# EAGLE board headstage-64_via-reduce (EAGLE 8.3.2), part 1 of 3
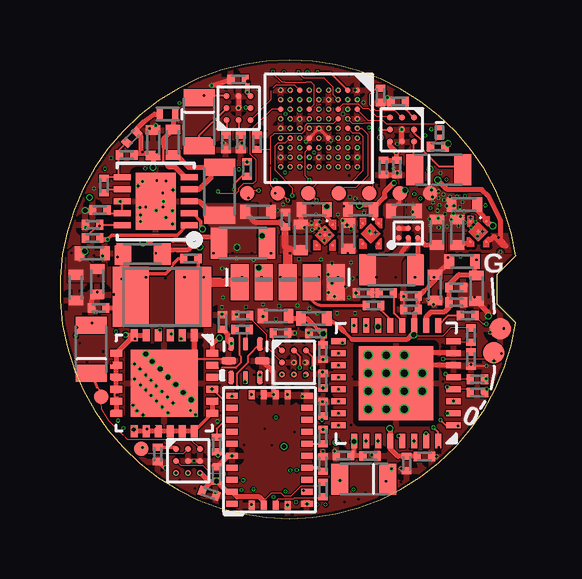
[diagram p0: board, top side]
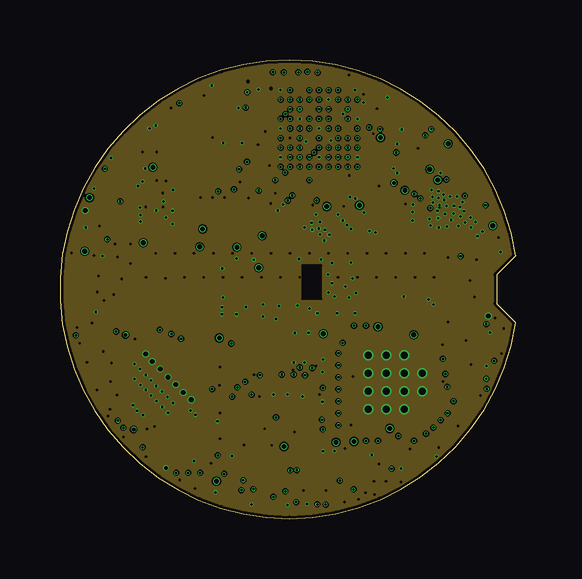
[diagram p1: board, inner layer GND1]
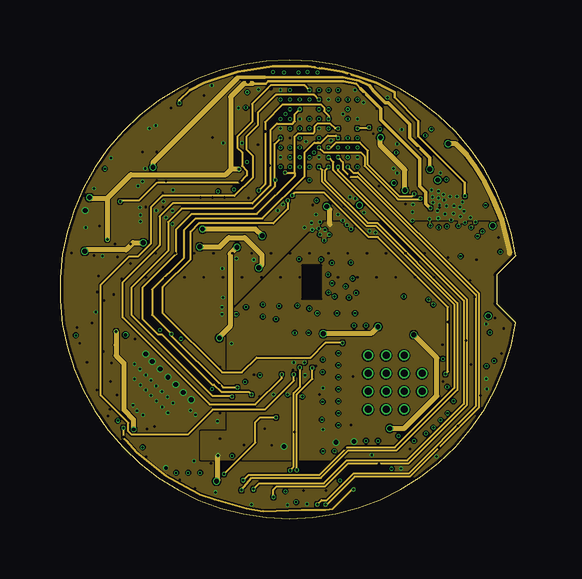
[diagram p2: board, inner layer Route2/PWR]
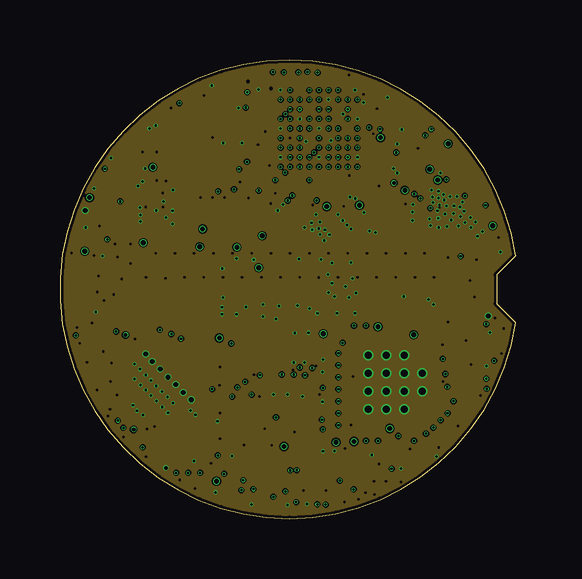
[diagram p3: board, inner layer GND2]
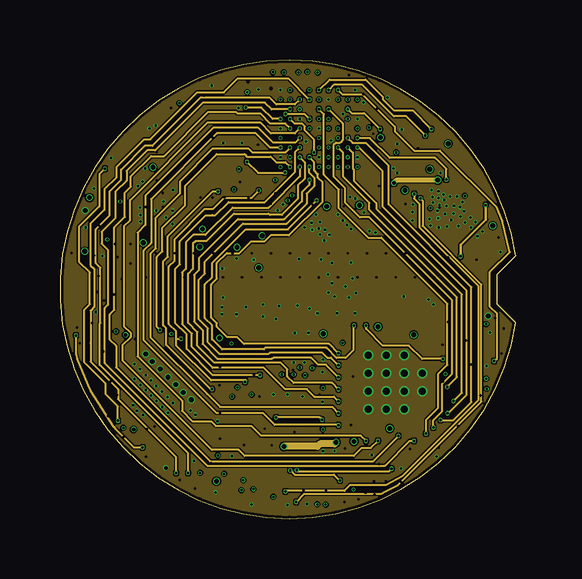
[diagram p4: board, inner layer Route3]
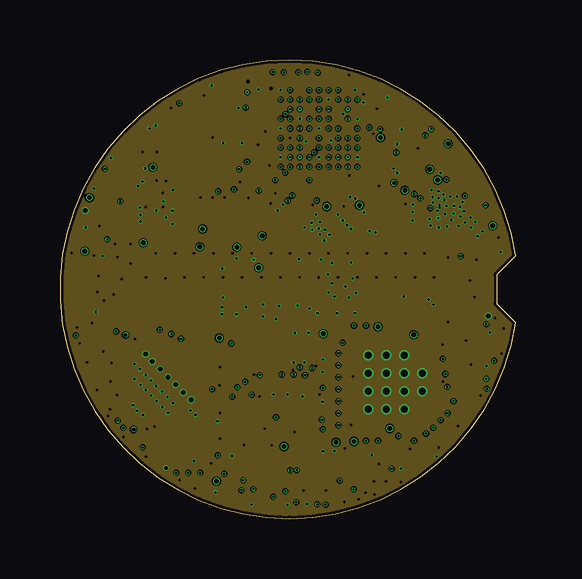
[diagram p5: board, inner layer GND3]
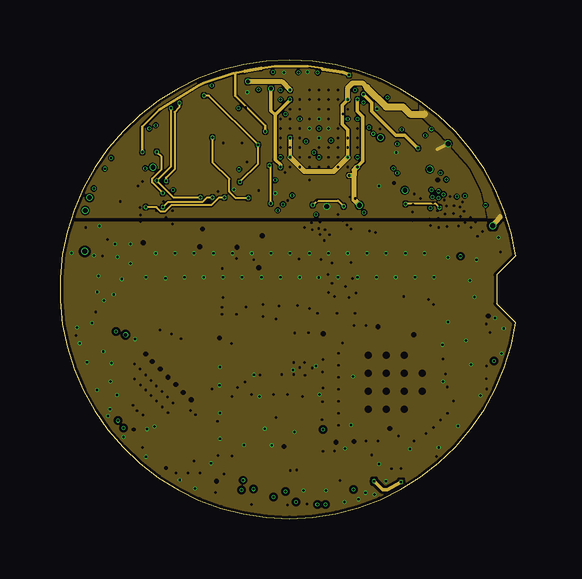
[diagram p6: board, inner layer AGND/PWR]
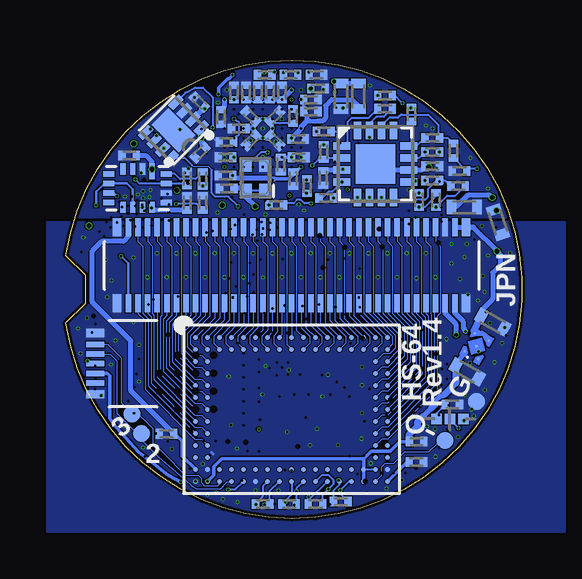
[diagram p7: board, bottom side, seen from below]

Size 18.99 x 19.11 mm. Coordinates in mm from the lower left corner, seen from the top.
Outline: 18.99,10.95 18.19,10.15 18.19,8.95 18.99,8.15 arc-343 18.99,10.95
Copper layers ((1*2*3*4*5*6)+(7*16)): Top 0.036mm / dielectric 4mil / GND1 0.036mm / dielectric 5mil / Route2/PWR 0.036mm / dielectric 0.10921875mm / GND2 0.036mm / dielectric 5mil / Route3 0.036mm / dielectric 4mil / GND3 0.035mm / dielectric 0.15mm / AGND/PWR 0.035mm / dielectric 0.2mm / Bottom 0.036mm
Design rules "headstage-256 *": minimum track width 2mil, minimum drill 0.1mm, track to track 2mil, track to pad 2mil, pad to pad 2mil, via to via 2mil, smd to smd 2mil, copper to edge 5mil, drill to drill 5mil, minimum pad ring 2mil, minimum via ring 1mil, stop-mask expansion 1mil, vias tented up to drill 1mm, thermal gap 10mil
Net classes: 1 thick: width 0.1 mm; 2 diff: width 0.076 mm, drill 0.1 mm, clearance 0.051 mm
tRestrict: area 10.1,9.1 to 10.9,10.7; 3 lines

## Footprints (pad centres in the part's own frame; a part is rotated, then mirrored left to right if it is on the bottom)
0201T = smd 0.3 x 0.4: 1 -0.3,0; 2 0.3,0
0402T = smd 0.4 x 0.6: 1 -0.533,0; 2 0.533,0
0805PT = smd 0.7 x 1.3: A -1,0; C 1,0
LED-0201T = smd 0.2 x 0.35: 1 -0.2,0; 2 0.2,0
CLP1006-2L = smd 0.24 x 0.49: A -0.325,0; C 0.325,0
HEADSTAGE-64-REV1.4-DAUGHTER-CARD = smd 0.75 x 1.5: 1 -2.55,-0.1; 2 -1.55,-0.1; 3 -0.55,-0.1; 4 0.45,-0.1; 5 1.45,-0.1
DF40-70HEAD-LESS-SILK = smd 0.23 x 0.75: 1 -6.8,-1.585; 2 -6.4,-1.585; 3 -6,-1.585; 4 -5.6,-1.585; 5 -5.2,-1.585; 6 -4.8,-1.585; 7 -4.4,-1.585; 8 -4,-1.585; 9 -3.6,-1.585; 10 -3.2,-1.585; 11 -2.8,-1.585; 12 -2.4,-1.585; 13 -2,-1.585; 14 -1.6,-1.585; 15 -1.2,-1.585; 16 -0.8,-1.585; 17 -0.4,-1.585; 18 0,-1.585; 19 0.4,-1.585; 20 0.8,-1.585; 21 1.2,-1.585; 22 1.6,-1.585; 23 2,-1.585; 24 2.4,-1.585; 25 2.8,-1.585; 26 3.2,-1.585; 27 3.6,-1.585; 28 4,-1.585; 29 4.4,-1.585; 30 4.8,-1.585; 31 5.2,-1.585; 32 5.6,-1.585; 33 6,-1.585; 34 6.4,-1.585; 35 6.8,-1.585; 36 6.8,1.585; 37 6.4,1.585; 38 6,1.585; 39 5.6,1.585; 40 5.2,1.585; 41 4.8,1.585; 42 4.4,1.585; 43 4,1.585; 44 3.6,1.585; 45 3.2,1.585; 46 2.8,1.585; 47 2.4,1.585; 48 2,1.585; 49 1.6,1.585; 50 1.2,1.585; 51 0.8,1.585; 52 0.4,1.585; 53 0,1.585; 54 -0.4,1.585; 55 -0.8,1.585; 56 -1.2,1.585; 57 -1.6,1.585; 58 -2,1.585; 59 -2.4,1.585; 60 -2.8,1.585; 61 -3.2,1.585; 62 -3.6,1.585; 63 -4,1.585; 64 -4.4,1.585; 65 -4.8,1.585; 66 -5.2,1.585; 67 -5.6,1.585; 68 -6,1.585; 69 -6.4,1.585; 70 -6.8,1.585 | smd 0.35 x 0.75: M1 -7.275,-1.585; M2 7.275,-1.585; M3 7.275,1.585; M4 -7.275,1.585
DF40-10HEAD_HALF = smd 0.23 x 0.75: 1 -0.8,-1.585; 2 -0.4,-1.585; 3 0,-1.585; 4 0.4,-1.585; 5 0.8,-1.585 | smd 0.35 x 0.75: M1 -1.275,-1.585; M2 1.275,-1.585
0603T = smd 0.7 x 0.9: 1 -0.82,0; 2 0.82,0
1210T = smd 1.5 x 2.5: 1 -1.3,0; 2 1.3,0
0805T = smd 0.7 x 1.3: 1 -1,0; 2 1,0
SJ_2_0201_T = smd 0.432 x 0.432: 1 -0.559,0; 2 0.559,0; COM 0,0
TP07R = smd 0.7 x 0.7: TP 0,0
TP09R = smd 0.9 x 0.9: TP 0,0
TP06R = smd 0.6 x 0.6: TP 0,0
CP_16_27-L = smd 0.711 x 0.305: 1 -1.397,0.75; 2 -1.397,0.25; 3 -1.397,-0.25; 4 -1.397,-0.75; 9 1.397,-0.75; 10 1.397,-0.25; 11 1.397,0.25; 12 1.397,0.75 | smd 0.305 x 0.711: 5 -0.75,-1.397; 6 -0.25,-1.397; 7 0.25,-1.397; 8 0.75,-1.397; 13 0.75,1.397; 14 0.25,1.397; 15 -0.25,1.397; 16 -0.75,1.397 | smd 1.651 x 1.651: PAD 0,0
CP_8_10-L = smd 0.635 x 0.305: 1 -0.889,0.75; 2 -0.889,0.25; 3 -0.889,-0.25; 4 -0.889,-0.75; 5 0.889,-0.75; 6 0.889,-0.25; 7 0.889,0.25; 8 0.889,0.75 | smd 0.991 x 1.6: PAD 0,0
QFN24-4X4 = smd 0.5 x 0.3: 1 -2,1.25; 2 -2,0.75; 3 -2,0.25; 4 -2,-0.25; 5 -2,-0.75; 6 -2,-1.25; 13 2,-1.25; 14 2,-0.75; 15 2,-0.25; 16 2,0.25; 17 2,0.75; 18 2,1.25 | smd 0.3 x 0.5: 7 -1.25,-2; 8 -0.75,-2; 9 -0.25,-2; 10 0.25,-2; 11 0.75,-2; 12 1.25,-2; 19 1.25,2; 20 0.75,2; 21 0.25,2; 22 -0.25,2; 23 -0.75,2; 24 -1.25,2 | smd 2.8 x 2.8: PAD 0,0
UQFN = smd 0.55 x 0.25: 1 -0.7,0.6; 3 -0.7,-0.6; 5 0.7,-0.6; 7 0.7,0.6 | smd 0.55 x 0.2: 2 -0.7,0; 6 0.7,0 | smd 0.3 x 0.6: 4 0,-0.7; 8 0,0.7
MQFN16-1.8X2.6 = smd 0.663 x 0.225: 1 -0.7,0.6 | smd 0.463 x 0.225: 2 -0.8,0.2; 3 -0.8,-0.2; 4 -0.8,-0.6; 9 0.8,-0.6; 10 0.8,-0.2; 11 0.8,0.2; 12 0.8,0.6 | smd 0.225 x 0.463: 5 -0.6,-1.2; 6 -0.2,-1.2; 7 0.2,-1.2; 8 0.6,-1.2; 13 0.6,1.2; 14 0.2,1.2; 15 -0.2,1.2; 16 -0.6,1.2
WLCSP3X3 = smd 0.25 x 0.25: A1 -0.5,0.5; A2 0,0.5; A3 0.5,0.5; B1 -0.5,0; B2 0,0; B3 0.5,0; C1 -0.5,-0.5; C2 0,-0.5; C3 0.5,-0.5
BGA104_0.5MM = smd 0.2 x 0.2: A1 -4,3; A2 -3.5,3; A3 -3,3; A4 -2.5,3; A5 -2,3; A6 -1.5,3; A7 -1,3; A8 -0.5,3; A9 0,3; A10 0.5,3; A11 1,3; A12 1.5,3; A13 2,3; A14 2.5,3; A15 3,3; A16 3.5,3; A17 4,3; B1 -4,2.5; B2 -3.5,2.5; B3 -3,2.5; B4 -2.5,2.5; B5 -2,2.5; B6 -1.5,2.5; B7 -1,2.5; B8 -0.5,2.5; B9 0,2.5; B10 0.5,2.5; B11 1,2.5; B12 1.5,2.5; B13 2,2.5; B14 2.5,2.5; B15 3,2.5; B16 3.5,2.5; B17 4,2.5; C1 -4,2; C2 -3.5,2; C16 3.5,2; C17 4,2; D1 -4,1.5; D2 -3.5,1.5; D16 3.5,1.5; D17 4,1.5; E1 -4,1; E2 -3.5,1; E16 3.5,1; E17 4,1; F1 -4,0.5; F2 -3.5,0.5; F16 3.5,0.5; F17 4,0.5; G1 -4,0; G2 -3.5,0; G16 3.5,0; G17 4,0; H1 -4,-0.5; H2 -3.5,-0.5; H16 3.5,-0.5; H17 4,-0.5; J1 -4,-1; J2 -3.5,-1; J16 3.5,-1; J17 4,-1; K1 -4,-1.5; K2 -3.5,-1.5; K16 3.5,-1.5; K17 4,-1.5; L1 -4,-2; L2 -3.5,-2; L16 3.5,-2; L17 4,-2; M1 -4,-2.5; M2 -3.5,-2.5; M3 -3,-2.5; M4 -2.5,-2.5; M5 -2,-2.5; M6 -1.5,-2.5; M7 -1,-2.5; M8 -0.5,-2.5; M9 0,-2.5; M10 0.5,-2.5; M11 1,-2.5; M12 1.5,-2.5; M13 2,-2.5; M14 2.5,-2.5; M15 3,-2.5; M16 3.5,-2.5; M17 4,-2.5; N1 -4,-3; N2 -3.5,-3; N3 -3,-3; N4 -2.5,-3; N5 -2,-3; N6 -1.5,-3; N7 -1,-3; N8 -0.5,-3; N9 0,-3; N10 0.5,-3; N11 1,-3; N12 1.5,-3; N13 2,-3; N14 2.5,-3; N15 3,-3; N16 3.5,-3; N17 4,-3
WQFN32-5X5 = smd 0.25 x 0.6: 1 1.75,2.4; 2 1.25,2.4; 3 0.75,2.4; 4 0.25,2.4; 5 -0.25,2.4; 6 -0.75,2.4; 7 -1.25,2.4; 8 -1.75,2.4; 17 -1.75,-2.4; 18 -1.25,-2.4; 19 -0.75,-2.4; 20 -0.25,-2.4; 21 0.25,-2.4; 22 0.75,-2.4; 23 1.25,-2.4; 24 1.75,-2.4 | smd 0.6 x 0.25: 9 -2.4,1.75; 10 -2.4,1.25; 11 -2.4,0.75; 12 -2.4,0.25; 13 -2.4,-0.25; 14 -2.4,-0.75; 15 -2.4,-1.25; 16 -2.4,-1.75; 25 2.4,-1.75; 26 2.4,-1.25; 27 2.4,-0.75; 28 2.4,-0.25; 29 2.4,0.25; 30 2.4,0.75; 31 2.4,1.25; 32 2.4,1.75 | smd 3.1 x 3.1: PAD 0,0
LGA-28-3.8X5.2 = smd 0.25 x 0.475: 1 -2.25,1.56; 6 -2.25,-1.56; 7 -1.75,-1.56; 8 -1.25,-1.56; 9 -0.75,-1.56; 10 -0.25,-1.56; 11 0.25,-1.56; 12 0.75,-1.56; 13 1.25,-1.56; 14 1.75,-1.56; 15 2.25,-1.56; 20 2.25,1.56; 21 1.75,1.56; 22 1.25,1.56; 23 0.75,1.56; 24 0.25,1.56; 25 -0.25,1.56; 26 -0.75,1.56; 27 -1.25,1.56; 28 -1.75,1.56 | smd 0.375 x 0.25: 2 -2.3,0.75; 3 -2.3,0.25; 4 -2.3,-0.25; 5 -2.3,-0.75; 16 2.3,-0.75; 17 2.3,-0.25; 18 2.3,0.25; 19 2.3,0.75
X2SON = smd 0.1 x 0.1: 1 -0.43,0.33; 2 -0.43,-0.33; 3 0.43,-0.33; 4 0.43,0.33 | smd 0.1 x 0.1 rotated 45: PAD 0,0
VBGA81-4X4 = smd 0.23 x 0.23: A1 1.6,1.6; A2 1.2,1.6; A3 0.8,1.6; A4 0.4,1.6; A5 0,1.6; A6 -0.4,1.6; A7 -0.8,1.6; A8 -1.2,1.6; A9 -1.6,1.6; B1 1.6,1.2; B2 1.2,1.2; B3 0.8,1.2; B4 0.4,1.2; B5 0,1.2; B6 -0.4,1.2; B7 -0.8,1.2; B8 -1.2,1.2; B9 -1.6,1.2; C1 1.6,0.8; C2 1.2,0.8; C3 0.8,0.8; C4 0.4,0.8; C5 0,0.8; C6 -0.4,0.8; C7 -0.8,0.8; C8 -1.2,0.8; C9 -1.6,0.8; D1 1.6,0.4; D2 1.2,0.4; D3 0.8,0.4; D4 0.4,0.4; D5 0,0.4; D6 -0.4,0.4; D7 -0.8,0.4; D8 -1.2,0.4; D9 -1.6,0.4; E1 1.6,0; E2 1.2,0; E3 0.8,0; E4 0.4,0; E5 0,0; E6 -0.4,0; E7 -0.8,0; E8 -1.2,0; E9 -1.6,0; F1 1.6,-0.4; F2 1.2,-0.4; F3 0.8,-0.4; F4 0.4,-0.4; F5 0,-0.4; F6 -0.4,-0.4; F7 -0.8,-0.4; F8 -1.2,-0.4; F9 -1.6,-0.4; G1 1.6,-0.8; G2 1.2,-0.8; G3 0.8,-0.8; G4 0.4,-0.8; G5 0,-0.8; G6 -0.4,-0.8; G7 -0.8,-0.8; G8 -1.2,-0.8; G9 -1.6,-0.8; H1 1.6,-1.2; H2 1.2,-1.2; H3 0.8,-1.2; H4 0.4,-1.2; H5 0,-1.2; H6 -0.4,-1.2; H7 -0.8,-1.2; H8 -1.2,-1.2; H9 -1.6,-1.2; J1 1.6,-1.6; J2 1.2,-1.6; J3 0.8,-1.6; J4 0.4,-1.6; J5 0,-1.6; J6 -0.4,-1.6; J7 -0.8,-1.6; J8 -1.2,-1.6; J9 -1.6,-1.6
DFN103X3 = smd 0.7 x 0.25: 1 -1.4,1; 2 -1.4,0.5; 3 -1.4,0; 4 -1.4,-0.5; 5 -1.4,-1; 6 1.4,-1; 7 1.4,-0.5; 8 1.4,0; 9 1.4,0.5; 10 1.4,1 | smd 1.65 x 2.38: PAD 0,0
XBGA6_1.2X0.8 = smd 0.23 x 0.23: A1 0.2,-0.4; A2 -0.2,-0.4; B1 0.2,0; B2 -0.2,0; C1 0.2,0.4; C2 -0.2,0.4
ASCO = smd 0.6 x 0.5: 1 -0.55,-0.4; 2 0.55,-0.4; 3 0.55,0.4; 4 -0.55,0.4

## Placement (x,y rotation side)
C1  0.1uF  [0201T]  8.27,14.19 270 bottom
C2  0.1uF  [0201T]  13.39,15.25 225 bottom
C3  0.1uF  [0201T]  13.43,17.35 135 bottom
C4  0.1uF  [0201T]  3.73,14.68 0 bottom
C5  0.1uF  [0201T]  6.77,8.19 90 top
C6  0.1uF  [0201T]  1.61,8.77 180 top
C7  10uF  [0402T]  1.55,9.86 270 top
C8  0.1uF  [0201T]  13.94,13.15 90 bottom
C9  0.1uF  [0201T]  16.36,15.13 180 bottom
C10  10nF  [0201T]  16.51,9.01 0 top
C11  0.1uF  [0201T]  16.51,9.62 0 top
C12  4.7uF  [0402T]  17.36,9.59 270 top
C13  0.1uF  [0201T]  15.19,2.58 0 top
C14  10nF  [0201T]  14.44,2.29 270 top
C15  10nF  [0201T]  14.62,8.71 180 top
C16  0.1uF  [0201T]  14.62,9.27 180 top
C17  4.7uF  [0402T]  15.62,9.62 270 top
C18  0.1uF  [0201T]  10.95,5.74 90 top
C19  1uF  [0201T]  9.19,7.73 0 top
C20  0.1uF  [0201T]  12.92,2.61 0 top
C21  10nF  [0201T]  11.81,2.63 180 top
C22  10nF  [0201T]  10.67,7.7 180 top
C23  0.1uF  [0201T]  10.95,6.93 270 top
C24  15uF  [0402T]  8.98,8.43 180 top
C25  0.1uF  [0201T]  13.06,8.87 0 top
C26  47nF  [0201T]  13.59,9.4 0 top
C27  0.1uF  [0201T]  14.03,14.63 270 top
C28  1uF  [0201T]  14.09,17.37 180 top
C29  10nF  [0201T]  4.39,2.35 0 bottom
C30  0.1uF  [0201T]  4.38,3.2 180 bottom
C31  0.1uF  [0201T]  6.52,1.85 90 top
C32  0.1uF  [0201T]  7.42,18.29 180 top
C33  0.1uF  [0201T]  10.95,2.27 270 top
C34  1uF  [0201T]  6.92,15.67 270 top
C35  0.1uF  [0201T]  6.21,1.05 340 top
C36  1uF  [0201T]  4.07,2.67 270 top
C37  10uF  [0402T]  1.21,8.18 330.9 bottom
C38  10uF  [0402T]  2.28,6.12 330.9 bottom
C39  10uF  [0402T]  10.03,11.71 90 top
C40  10uF  [0402T]  10.59,12.88 180 top
C41  1uF  [0402T]  8.25,12.78 0 top
C42  0.22uF  [0402T]  2.39,12.97 0 bottom
C43  2.2nF  [0201T]  9.29,15.05 0 bottom
C44  4.7nF  [0201T]  12.34,15.05 180 bottom
C45  10nF  [0201T]  11.99,17.75 90 bottom
C46  22nF  [0201T]  8.79,17.45 0 bottom
C47  47nF  [0201T]  8.79,16.95 0 bottom
C48  0.1uF  [0201T]  10.04,14.75 270 bottom
C49  1uF  [0201T]  9.33,15.81 0 bottom
C50  4.7nF  [0201T]  9.99,17.75 90 bottom
C51  10nF  [0201T]  10.49,17.75 90 bottom
C52  22nF  [0201T]  10.99,17.75 90 bottom
C53  0.47uF  [0201T]  11.49,17.75 90 bottom
C54  10uF  [0402T]  7.53,17.59 270 bottom
C55  10uF  [0402T]  12.01,11.77 90 top
C56  10uF  [0402T]  12.53,12.88 180 top
C57  10pF  [0201T]  2.99,15.88 45 top
C58  4.7nF  [0201T]  10.29,16.75 45 bottom
C59  10nF  [0201T]  10.29,15.75 315 bottom
C60  22nF  [0201T]  11.27,15.75 225 bottom
C61  47nF  [0201T]  11.29,16.75 135 bottom
C62  0.47uF  [0201T]  11.79,16.25 180 bottom
C63  1uF  [0402T]  4.7,15.67 90 top
C64  0.22uF  [0402T]  3.88,15.65 90 top
C65  4.7nF  [0201T]  9.52,14.15 270 bottom
C66  10nF  [0201T]  12.34,14.29 180 bottom
C67  22nF  [0201T]  8.49,17.91 0 bottom
C68  0.47uF  [0201T]  12.53,16.73 270 bottom
C69  10uF  [0402T]  14.33,12.81 0 top
C70  4.7uF  [0402T]  15.71,11.93 90 top
C71  10nF  [0201T]  12.29,13.75 180 bottom
C72  1uF  [0402T]  16.55,11.93 90 top
C73  15uF  [0402T]  16.85,13.08 180 top
C74  10uF  [0402T]  1.34,11.05 0 top
C75  0.1uF  [0201T]  9.39,12.45 90 top
C76  1uF  [0201T]  13.47,14.63 270 top
C77  10uF  [0402T]  0.66,9.62 270 top
D4  VEMD1160X01  [0805PT]  12.66,1.64 0 top
D5  VEMD1160X01  [0805PT]  15.78,14.53 180 top
D6  VEMD1160X01  [0805PT]  5.8,16.53 90 top
D7  XZVGR155W  [LED-0201T]  15.81,16.08 270 top
D8  VEMD1160X01  [0805PT]  1.3,7.05 270 top
D9  VSKY05401006  [CLP1006-2L]  4.48,16.85 0 top
J1  [HEADSTAGE-64-REV1.4-DAUGHTER-CARD]  10.04,9.95 0 top
J8  DF40C-70DP-0.4V(51)  [DF40-70HEAD-LESS-SILK]  9.59,10.55 0 bottom
J9  DF40C-10DP-0.4V(51)  [DF40-10HEAD_HALF]  16.19,6.45 270 bottom
L2  BLM18KG601SN1D  [0603T]  3.44,11.02 0 top
L4  CBC3225T101MR  [1210T]  4.25,9.23 180 top
L6  BLM15PX601SN1D  [0402T]  16.75,10.71 0 top
L7  BLM15PX601SN1D  [0402T]  0.99,12.35 287.8 bottom
L8  BLM15PX601SN1D  [0402T]  10.58,8.33 180 top
L9  MLZ2012M100WT000  [0805T]  7.62,11.47 180 top
L10  BLM15PX601SN1D  [0402T]  6.81,17.59 90 bottom
L11  MLZ2012M100WT000  [0805T]  6.65,13.63 270 top
L12  LQM21PN1R0NGRD  [0805T]  13.81,10.36 180 top
R1  9k, 0.1%  [0201T]  8.25,15.27 90 bottom
R2  1k, 0.1%  [0201T]  8.15,13.35 180 bottom
R3  1M  [0201T]  2.89,4.75 0 bottom
R4  10k, 0.1%  [0201T]  10.23,13.06 0 bottom
R5  10k, 0.1%  [0201T]  8.25,16.13 0 bottom
R6  10k, 0.1%  [0201T]  4.6,16.84 90 bottom
R7  10k, 0.1%  [0201T]  3.73,15.86 180 bottom
R8  10k, 0.1%  [0201T]  3.73,14.09 180 bottom
R9  10k  [0201T]  8.21,15.68 90 top
R10  1k  [0201T]  5.45,10.83 180 top
R11  10k, 0.1%  [0201T]  5.7,17.07 0 bottom
R12  100  [0201T]  5.7,17.63 180 bottom
R13  2.86k, 1%  [0201T]  2.65,13.85 180 bottom
R14  10k, 0.1%  [0201T]  2.84,15.32 90 bottom
R15  590  [0201T]  7.59,7.88 0 top
R16  10k, 0.1%  [0201T]  3.57,13.27 270 bottom
R17  10k, 0.1%  [0201T]  4.28,13.27 270 bottom
R18  10k, 0.1%  [0201T]  3.73,15.27 180 bottom
R19  10k, 0.1%  [0201T]  2.59,14.48 0 bottom
R21  1k  [0201T]  13.29,13.15 270 bottom
R22  10k  [0201T]  13.29,14.15 90 bottom
R23  10k  [0201T]  13.94,14.16 90 bottom
R24  15k  [0201T]  7.61,8.45 0 top
R25  49.9  [0201T]  12.64,9.4 0 top
R26  15k  [0201T]  13.35,17.63 90 top
R27  10k  [0201T]  17.13,7.64 270 top
R28  10k  [0201T]  10.96,1.21 270 top
R29  0  [0201T]  14.8,3.53 0 bottom
R30  100k  [0201T]  17.13,6.64 270 top
R31  100  [0201T]  10.79,0.6 0 bottom
R32  10k  [0201T]  10.95,3.41 90 top
R33  10k  [0201T]  16.99,8.45 180 top
R34  100  [0201T]  9.69,0.6 0 bottom
R35  100  [0201T]  8.59,0.6 180 bottom
R36  15k  [0201T]  7.53,15.67 90 top
R37  2k  [0201T]  15.74,15.49 180 top
R38  10k  [0201T]  12.31,15.69 0 bottom
R41  4.7k  [0201T]  7.79,14.56 270 top
R42  15k  [0201T]  10.95,4.57 270 top
R44  4.7k  [0201T]  17.39,5.25 180 top
R45  1M  [0201T]  1.36,11.69 0 top
R46  90.9k  [0201T]  1.36,12.24 0 top
R47  100  [0201T]  7.54,0.7 0 bottom
R48  83.3k  [0201T]  1.83,13.87 270 top
R49  10k  [0201T]  1.66,12.85 180 top
R50  1M  [0201T]  2.78,15.14 180 top
R51  4.7k  [0201T]  8.94,13.85 270 bottom
R52  4.7k  [0201T]  17.39,5.8 180 top
R53  10k  [0201T]  6.53,3.08 90 top
R54  10k  [0201T]  9.53,16.77 90 bottom
R55  10k  [0201T]  9.63,18.49 180 bottom
R56  10k  [0201T]  10.71,18.49 180 bottom
R57  10k  [0201T]  8.55,18.49 0 bottom
SJ1  [SJ_2_0201_T]  2.99,4.15 180 bottom
TP1  VCC  [TP07R]  1.89,4.88 0 bottom
TP2  VCC  [TP07R]  3.19,3.25 0 bottom
TP3  [TP09R]  18.34,7.9 0 top
TP4  [TP09R]  18.07,6.91 0 top
TP5  VCC  [TP07R]  16.24,4.36 0 bottom
TP6  VCC  [TP07R]  15.85,3.54 0 bottom
TP7  [TP06R]  1.71,5.07 0 top
TP8  [TP06R]  3.39,2.91 0 top
TP9  [TP06R]  14.16,13.56 0 top
TP10  [TP06R]  9.08,13.56 270 top
TP11  [TP06R]  7.81,13.56 270 top
TP12  [TP06R]  11.62,13.56 270 top
TP13  [TP06R]  10.35,13.56 270 top
TP14  gnd  [TP06R]  12.89,13.56 270 top
TP15  VCC  [TP06R]  15.43,13.56 270 top
U1  ADA4062-4ACPZ-R7  [CP_16_27-L]  6.1,14.77 0 bottom
U2  AD5681RBCPZ-1RL7  [CP_8_10-L]  14.51,16.18 225 bottom
U3  CAT4016_QFN  [QFN24-4X4]  4.34,5.64 270 top
U4  TPL0501_UQFN  [UQFN]  7.73,6.57 90 top
U5  DG509B  [MQFN16-1.8X2.6]  16.01,13.76 270 bottom
U6  TS4231  [WLCSP3X3]  9.74,6.5 0 top
U7  RHD2064_BGA  [BGA104_0.5MM]  9.59,4.55 0 bottom
U8  TS4231  [WLCSP3X3]  14.24,16.2 270 top
U9  DS90UB933A_WQFN  [WQFN32-5X5]  14,5.64 270 top
U10  BNO055  [LGA-28-3.8X5.2]  8.73,2.86 90 top
U11  TS4231  [WLCSP3X3]  7.44,17.1 90 top
U12  TS4231  [WLCSP3X3]  5.34,2.4 0 top
U13  TLV70733  [X2SON]  1.88,7.18 60.9 bottom
U14  10M08DC  [VBGA81-4X4]  10.79,16.25 0 top
U15  TLV70733  [X2SON]  11.03,11.81 270 top
U16  LT3463  [DFN103X3]  3.99,13.21 180 top
U17  TLV70725  [X2SON]  12.95,11.87 270 top
U18  TPS62621  [XBGA6_1.2X0.8]  14.51,11.89 270 top
U19  ASCO-50.000MHZ-EK-T3  [ASCO]  11.09,14.2 90 bottom
U20  TLV70712  [X2SON]  17.43,11.95 270 top

## Library data of the parts
C1 = jonnew; PARTNP: CL03A104KA3NNNC
C2 C3 C5 C6 C18 C27 C32 C33 C35 C75 = jonnew; PARTNO: C0603X5R1C104K030BC
C4 C8 C9 = jonnew; PARTNO: CL03A104KA3NNNC
C7 C74 C77 = jonnew; PARTNO: CL05A475MO5NUNC
C10 C11 C13-C16 C20-C23 C30 C31 C43-C48 C50-C52 C57-C61 C65-C67 C71 D4-D9 J1 J8 J9 L2 L4 L9 L11 L12 R1-R19 R21-R38 R41 R42 R44-R57 SJ1 TP1-TP15 U1 U2 U5-U20 = jonnew
C12 C17 = jonnew; PARTNO: GRM155R61A475MEAAD
C19 C28 C34 C36 C49 C76 = jonnew; PARTNO: CL03A105MP3ZSNH
C24 = jonnew; PARTNO: CL05A226MQ5QUNC
C25 = jonnew; PARTNO: C1005X7R1H104K050BB
C26 = jonnew; PARTNO: C1005X7R1H473K050BB
C29 = jonnew; PARTNO: GRM033R71E103KE14D
C37 C39 C41 C55 C63 C69 C70 C72 = jonnew; PARTNO: CL05A105KO5NNNC
C38 C40 C54 C56 = jonnew; PARTNO: CL05A106MQ5NUNC
C42 C64 = jonnew; PARTNO: UMK105BJ224KV-F
C53 C62 C68 = jonnew; PARTNO: GRM033R60J474KE90D
C73 = jonnew; PARTNO: CL05A226MQ6ZUN8
L6-L8 L10 = jonnew; PARTNO: BLM15PX601SN1D
U3 = jonnew; PARTNO: CAT4016HV6-GT2
U4 = jonnew; PARTNO: TPL0501-100RSER

## Nets
!IMU_BL: R28.2 U10.4
!IMU_RESET: R32.1 U10.11
$N324: C50.1 C51.1 C52.1 C53.1 C54.1 L10.2 U14.A8
+1V2: C43.1 C44.1 C45.1 C46.1 C47.1 C48.1 C49.1 C73.1 L10.1 U14.B2 U14.B9 U14.H2 U14.H8 U20.1
+1V8: C13.1 C14.1 C15.1 C16.1 C17.1 C70.1 L6.1 L8.1 L12.1 R27.1 U9.11 U9.28 U18.C1
+2V5: C56.1 C65.1 C66.1 C67.1 C68.1 C72.1 U14.B1 U14.B8 U14.J1 U14.J9 U17.1 U20.3 U20.4
+3V3: C3.1 C5.1 C18.1 C20.1 C21.1 C27.1 C31.1 C32.1 C35.1 C40.1 C58.1 C59.1 C60.1 C61.1 C62.1 C71.1 C76.1 R22.1 R28.1 R32.2 R33.1 R37.1 R41.2 R44.1 R51.2 R52.1 R53.1 R54.1 R55.1 R56.1 U2.2 U4.7 U6.C3 U8.C3 U9.25 U10.3 U10.28 U11.C3 U12.C3 U14.D5 U14.E4 U14.E6 U14.F5 U15.1 U19.1 U19.4
+3V3_AN: C30.2 C38.1 J9.4 U7.M15 U7.M16 U7.N2 U7.N15 U13.1
+15V0: C1.1 C8.1 C42.1 R45.2 U1.3 U5.12 U16.1
-15V0: C4.1 C9.1 C57.2 C64.1 D9.A R50.1 U1.10 U1.PAD U5.1
AGND: C29.2 C30.1 C37.2 C38.2 J8.37 J8.M1 J8.M2 J8.M4 J9.M1 J9.M2 L7.2 R3.2 R29.1 TP1.TP U7.M2 U7.M17 U7.N1 U7.N6 U13.2 U13.PAD
AUXIN1: J9.1 TP5.TP U7.N3
AUXIN2: J9.2 TP6.TP U7.N4
AUXIN3: SJ1.COM U7.N5
CONF_DONE: R56.2 U14.A2
CONFIG_SEL: R57.1 U14.C6
DAC_CS: U2.5 U14.A5
DAC_MOSI: U2.6 U14.A4
DAC_SCLK/TDI: TP12.TP U2.4 U14.E1
DATA1: U6.C1 U14.C7
DATA2: U8.C1 U14.C3
DATA3: U11.C1 U14.A7
DATA4: U12.C1 U14.B6
DIN0: U9.19 U14.J6
DIN1: U9.20 U14.G6
DIN2: U9.21 U14.H7
DIN3: U9.22 U14.J7
DIN4: U9.23 U14.G8
DIN5: U9.24 U14.G9
DIN6: U9.26 U14.F7
DIN7: U9.27 U14.E7
DIN8: U9.29 U14.E8
DIN9: U9.30 U14.C8
DIN10: U9.31 U14.C5
DIN11: U9.32 U14.C4
E0: J8.2 U7.K2
E1: J8.69 U7.J1
E2: J8.3 U7.J2
E3: J8.68 U7.H1
E4: J8.4 U7.H2
E5: J8.67 U7.G1
E6: J8.5 U7.G2
E7: J8.66 U7.F1
E8: J8.6 U7.F2
E9: J8.65 U7.E1
E10: J8.7 U7.E2
E11: J8.64 U7.D1
E12: J8.8 U7.D2
E13: J8.63 U7.C1
E14: J8.9 U7.C2
E15: J8.62 U7.B1
E16: J8.10 U7.A1
E17: J8.61 U7.B2
E18: J8.11 U7.A2
E19: J8.60 U7.B3
E20: J8.12 U7.A3
E21: J8.59 U7.B4
E22: J8.13 U7.A4
E23: J8.58 U7.B5
E24: J8.14 U7.A5
E25: J8.57 U7.B6
E26: J8.15 U7.A6
E27: J8.56 U7.B7
E28: J8.16 U7.A7
E29: J8.55 U7.B8
E30: J8.17 U7.A8
E31: J8.54 U7.B9
E32: J8.18 U7.A9
E33: J8.53 U7.A10
E34: J8.19 U7.B10
E35: J8.52 U7.A11
E36: J8.20 U7.B11
E37: J8.51 U7.A12
E38: J8.21 U7.B12
E39: J8.50 U7.A13
E40: J8.22 U7.B13
E41: J8.49 U7.A14
E42: J8.23 U7.B14
E43: J8.48 U7.A15
E44: J8.24 U7.B15
E45: J8.47 U7.A16
E46: J8.25 U7.B16
E47: J8.46 U7.A17
E48: J8.26 U7.B17
E49: J8.45 U7.C16
E50: J8.27 U7.C17
E51: J8.44 U7.D16
E52: J8.28 U7.D17
E53: J8.43 U7.E16
E54: J8.29 U7.E17
E55: J8.42 U7.F16
E56: J8.30 U7.F17
E57: J8.41 U7.G16
E58: J8.31 U7.G17
E59: J8.40 U7.H16
E60: J8.32 U7.H17
E61: J8.39 U7.J16
E62: J8.33 U7.J17
E63: J8.38 U7.K16
ENV1: U6.C2 U14.B5
ENV2: U8.C2 U14.C2
ENV3: U11.C2 U14.D9
ENV4: U12.C2 U14.B7
ESTIM_POW_EN: R49.1 U14.A6 U16.8 U16.9
GND: C1.2 C2.2 C3.2 C4.2 C5.2 C6.2 C7.2 C8.2 C9.2 C10.2 C11.2 C12.2 C13.2 C14.2 C15.2 C16.2 C17.2 C18.2 C19.2 C20.2 C21.2 C22.2 C23.2 C24.2 C27.2 C28.2 C31.2 C32.2 C33.1 C34.2 C35.2 C36.2 C39.2 C40.2 C41.2 C42.2 C43.2 C44.2 C45.2 C46.2 C47.2 C48.2 C49.2 C50.2 C51.2 C52.2 C53.2 C54.2 C55.2 C56.2 C58.2 C59.2 C60.2 C61.2 C62.2 C64.2 C65.2 C66.2 C67.2 C68.2 C69.2 C70.2 C71.2 C72.2 C73.2 C74.2 C75.2 C76.2 C77.2 J1.5 L7.1 R9.2 R19.1 R21.1 R23.2 R24.1 R25.1 R26.1 R30.2 R36.1 R38.1 R42.1 R46.1 R49.2 R57.2 TP3.TP TP15.TP U2.3 U2.PAD U3.1 U3.PAD U4.4 U4.8 U5.2 U5.13 U5.14 U6.B2 U6.B3 U8.B2 U8.B3 U9.6 U9.7 U9.PAD U10.2 U10.5 U10.6 U10.15 U10.16 U10.17 U10.18 U10.25 U11.B2 U11.B3 U12.B2 U12.B3 U14.A1 U14.A9 U14.B4 U14.D1 U14.D7 U14.E5 U14.E9 U14.F4 U14.F6 U14.H1 U14.H5 U14.H9 U15.2 U15.PAD U16.PAD U17.2 U17.PAD U18.C2 U19.2 U20.2 U20.PAD
GPIO0: J9.3 TP4.TP U9.15 U14.A3
GPIO1/TDO: TP13.TP U9.16 U14.E2
GPIO2/TMS: R9.1 TP10.TP U9.17 U14.D3
GPIO3: U9.18 U14.H6
HSYNC: U9.1 U14.F2
IMU_SCL: R41.1 U10.19 U14.E3
IMU_SDA: R51.1 U10.20 U14.F9
ISTIM: J8.1 U5.6 U5.10
ISTIM_MONO: R14.1 R19.2 SJ1.1
ISTIM_PRE: R12.1 U1.9 U5.7
JTAGEN: R38.2 TP14.TP U14.D2
LED-1: J8.34 U3.5 U3.6 U3.7 U3.8 U3.9 U3.10 U3.11 U3.12
LED-2: J8.35 U3.13 U3.14 U3.15 U3.16 U3.17 U3.18 U3.19 U3.20
LED_BLANK: R53.2 U3.21 U14.C9
LED_LATCH: U3.4 U14.J8
LED_MOSI/TCK: TP11.TP U3.2 U4.2 U14.D4
LED_SCLK: U3.3 U4.5 U14.F3
MIDFILT: J1.1 L4.1 R10.1
N$1: R15.2 U4.6
N$2: C63.1 L11.1 U16.4
N$3: C57.1 R48.1 R50.2 U16.6
N$4: D4.C U6.A3
N$5: D4.A U6.A2
N$6: R24.2 U6.B1
N$7: C19.1 U6.A1
N$8: L9.1 U16.2
N$9: D5.C U8.A3
N$10: D5.A U8.A2
N$11: R26.2 U8.B1
N$12: C28.1 U8.A1
N$13: C6.1 L2.1 L4.2 R10.2
N$14: R15.1 U3.23
N$15: D6.C U11.A3
N$16: D6.A U11.A2
N$17: R36.2 U11.B1
N$18: C34.1 U11.A1
N$19: C63.2 D9.C U16.5
N$20: R1.2 R2.2 R12.2 U1.4
N$21: J1.2 L2.2
N$22: R3.1 SJ1.2
N$23: R21.2 U5.11
N$24: R45.1 R46.2 U16.10
N$26: D8.C TP7.TP U12.A3
N$27: R48.2 U16.7
N$28: C25.2 U9.13
N$29: D7.2 R37.2
N$30: R33.2 U9.9
N$31: C26.2 U9.12
N$32: C26.1 R25.2
N$33: R27.2 R30.1 U9.8
N$34: C10.1 C11.1 C12.1 L6.2 U9.10
N$35: C22.1 C23.1 C24.1 L8.2 U9.14
N$36: C29.1 U7.N17
N$37: U14.D8 U19.3
N$38: D8.A TP8.TP U12.A2
N$39: TP2.TP U7.N16
N$41: R42.2 U12.B1
N$42: C36.1 U12.A1
N$44: R22.2 U5.16
N$45: R54.2 U14.D6
N$46: L12.2 U18.B1
N$53: R1.1 R4.2 U1.2
N$54: R5.2 R11.1 U1.1
N$55: R2.1 R11.2 U1.15
N$57: R16.1 R17.2 U1.6
N$59: R13.1 R16.2 U1.5
N$60: R8.1 R13.2 U1.8
N$61: R6.2 R8.2 U1.7
N$62: R7.1 R14.2 U1.14
N$63: R6.1 R7.2 U1.12
N$64: R17.1 R18.2 U1.11
N$67: C33.2 U10.9
NSTATUS: R55.2 U14.B3
PCLK: U9.3 U14.G2
POT_CS: U4.3 U14.G7
REF: J8.70 R29.2 U7.M1
RHD_CLK_N [diff]: R34.1 U7.N9 U14.G5
RHD_CLK_P [diff]: R34.2 U7.N10 U14.G4
RHD_CS_N [diff]: R31.1 U7.N7 U14.J2
RHD_CS_P [diff]: R31.2 U7.N8 U14.H3
RHD_MISO_N [diff]: R47.1 U7.N13 U14.J5
RHD_MISO_P [diff]: R47.2 U7.N14 U14.J4
RHD_MOSI_N [diff]: R35.1 U7.N11 U14.H4
RHD_MOSI_P [diff]: R35.2 U7.N12 U14.J3
SCL: R44.2 U9.4 U14.G3
SDA: R52.2 U9.5 U14.F8
SIGOUT: C25.1 J1.4
STATUS: D7.1 U14.C1
STIM_NULL: R23.1 U5.15 U14.F1
VCOAX: C2.1 C7.1 C37.1 C39.1 C41.1 C55.1 C69.1 C74.1 C75.1 C77.1 J1.3 J8.36 J8.M3 L9.2 L11.2 TP9.TP U2.1 U3.24 U13.3 U13.4 U15.3 U15.4 U16.3 U17.3 U17.4 U18.A1 U18.A2 U18.B2
VDAC: R4.1 U2.8
VREF_2V5: R5.1 R18.1 U2.7
VSYNC: U9.2 U14.G1

## Tracks (layer width: path | path; a pad name or v marks a point on that pad's centre or on a via)
!IMU_BL
  Top 0.051: R28.2 10.96,0.86 10.25,0.86 9.77,0.86 9.74,0.83 9.09,0.83 8.98,0.72 U10.4
!IMU_RESET
  Top 0.076: U10.11 R32.1
$N324  (via drill 0.1, 0.15 layers 7-16)
  AGND/PWR 0.2: v7.83,18.21 9.23,18.21 U14.A8
  Bottom 0.2: C53.1 C52.1 C51.1 C50.1 U14.A8 | L10.2 C54.1 v7.83,18.21
  other vias: 9.59,17.85
  pour Bottom (no thermals): 9.52,17.85 arc180 9.67,17.85 arc180
  pour AGND/PWR (no thermals): 9.52,17.85 arc180 9.67,17.85 arc180
  pour AGND/PWR (no thermals): 7.73,18.21 arc180 7.93,18.21 arc180
  pour Bottom (no thermals): 7.73,18.21 arc180 7.93,18.21 arc180
+1V2  (via drill 0.1, 0.1 layers 7-16, 0.2)
  Top 0.2: v18.03,12.2 v18.03,12.21 U20.1 17.67,12.55 17.38,12.84 C73.1
  AGND/PWR 0.15: C43.1 v9.59,15.85 | C45.1 11.75,17.21 11.75,16.43 11.99,16.19 U14.H2
  AGND/PWR 0.2: v18.03,12.2 18.34,12.56 18.34,12.59 | U14.H2 11.39,14.45 10.19,14.45 C43.1 | C45.1 11.99,17.95 12.19,18.15 12.57,18.15 12.59,18.15 12.79,17.95
  AGND/PWR 0.3: 15.19,16.85 14.59,16.85 14.29,17.15 13.59,17.15 12.79,17.95
  Bottom 0.076: C46.1 U14.B9 | C44.1 U14.H2 | C49.1 v9.59,15.85
  Bottom 0.1: U14.B9 C46.1
  Bottom 0.15: C48.1 C43.1 | C47.1 C46.1
  Bottom 0.2: 9.11,16.88 C47.1 8.96,16.82 8.96,16.57 8.94,16.57 | 6.73,17.13 L10.1 | 6.73,17.13 6.72,17.14 | 8.94,16.57 8.84,16.57 8.5,16.56 8.3,16.56 8.17,16.69 8.17,17.2 7.93,17.46 7.07,17.46 6.74,17.13 6.73,17.13 | C49.1 9.27,16.17 9.18,16.25 9.18,16.33 8.94,16.57
  other vias: 9.59,15.05 11.99,17.45 9.19,17.45 11.99,15.05
  pour AGND/PWR (rank 2): 18.79,12.55 18.79,17.5 14.99,17.5 14.99,17.1 14.99,16.85 15.89,16 17.09,14.65 17.59,13.65 17.84,12.55
  pour AGND/PWR (no thermals): 9.52,15.05 arc180 9.67,15.05 arc180
  pour Bottom (no thermals): 9.52,15.05 arc180 9.67,15.05 arc180
  pour AGND/PWR (no thermals): 9.52,15.05 arc180 9.67,15.05 arc180
  pour AGND/PWR (no thermals): 11.92,17.45 arc180 12.07,17.45 arc180
  pour AGND/PWR (no thermals): 11.92,17.45 arc180 12.07,17.45 arc180
  pour AGND/PWR (no thermals): 9.52,15.85 arc180 9.67,15.85 arc180
  pour Bottom (no thermals): 9.52,15.85 arc180 9.67,15.85 arc180
  pour AGND/PWR (no thermals): 17.91,12.2 arc180 18.16,12.2 arc180
  pour Top (no thermals): 17.91,12.2 arc180 18.16,12.2 arc180
  pour Bottom (no thermals): 9.12,17.45 arc180 9.27,17.45 arc180
  pour AGND/PWR (no thermals): 11.92,15.05 arc180 12.07,15.05 arc180
  pour AGND/PWR (no thermals): 11.92,15.05 arc180 12.07,15.05 arc180
  pour Bottom (no thermals): 11.92,15.05 arc180 12.07,15.05 arc180
+1V8  (via drill 0.2 layers 1-6)
  Top 0.051: R27.1 16.28,7.94 15.94,7.6 14.79,7.6 v14.74,7.65
  Top 0.15: 14.91,10.49 L12.1 14.92,10.4 | 12.17,7.45 11.83,7.8 | 15.37,9.68 15.17,9.48
  Top 0.2: 15.6,11.4 15.57,11.37 C70.1 15.2,11.4 U18.C1 14.91,10.51 L12.1 | U9.11 14.75,8.54 C15.1 C16.1 14.96,9.27 15.17,9.48 | U9.11 14.74,8.03 14.74,7.75 14.44,7.45 12.17,7.45 | v13.74,3.75 v13.75,3.74 U9.28 13.75,2.91 14.07,2.59 C14.1 C13.1 | L8.1 11.54,8.08 11.83,7.8 | 15.37,9.68 15.62,9.93 C17.1 16.18,10.61 L6.1 | U9.11 v14.74,7.65
  Route2/PWR 0.2: v14.74,7.65 15.7,6.69 15.7,5.12 14.34,3.75 v13.74,3.75
  pour Top (rank 2, no thermals): 15.43,10.23 16.34,10.23 16.34,10.95 15.99,10.95 15.99,11.85 15.43,11.85
  pour Route2/PWR (no thermals): 14.62,7.65 arc180 14.87,7.65 arc180
  pour Top (no thermals): 14.62,7.65 arc180 14.87,7.65 arc180
  pour Top (no thermals): 14.62,7.65 arc180 14.87,7.65 arc180
  pour Route2/PWR (no thermals): 13.62,3.75 arc180 13.87,3.75 arc180
  pour Top (no thermals): 13.62,3.75 arc180 13.87,3.75 arc180
+2V5  (via drill 0.1, 0.1 layers 7-16, 0.15 layers 1-6, 0.15 layers 7-16, 0.2, 0.2 layers 1-6)
  Top 0.15: 12.89,13.05 C56.1
  Top 0.2: C56.1 13.06,12.61 U17.1 | 12.89,13.05 v12.48,13.05 | C72.1 16.67,11.4 U20.3 | C56.1 13.06,13.03 | U20.4 17.95,11.62 18.08,11.76 18.49,11.35 18.59,11.35 18.34,11.61 18.34,12.45 17.84,13.44 17.58,13.7 16.14,13.7 v15.74,14.1 | C56.1 13.06,12.93 13.54,13.4 13.54,13.61 v13.91,13.98
  Route3 0.2: v13.91,13.98 14.03,14.1 v15.74,14.1
  AGND/PWR 0.1: U14.J1 12.45,14.71 | 12.45,14.71
  AGND/PWR 0.15: U14.B1 12.39,16.97 12.62,16.75 12.62,14.88 12.45,14.71 U14.J1 | U14.J9 9.19,14.73 8.96,14.96 8.96,16.83 | 8.96,16.83 U14.B8 | C67.1 8.79,17 8.96,16.83
  AGND/PWR 0.2: v12.48,13.05 12.25,13.28 12.25,14.29 | 12.25,14.29 v12.05,14.29 | U14.J1 12.25,14.51 12.25,14.29
  Bottom 0.15: v12.05,14.29 C66.1 | U14.J9 9.42,14.43 9.51,14.33 C65.1
  Bottom 0.152: 9.42,14.43 9.69,14.15 10.3,14.15
  Bottom 0.2: 10.3,14.15 10.44,14.15 10.49,14.2 11.95,14.2 C66.1 | U14.B1 12.39,17.17 C68.1
  other vias: 9.59,17.45 12.39,17.45 9.19,14.65 8.79,17.91 12.39,14.65
  pour Top (isolate 0.1, rank 3, no thermals): 16.19,11.85 16.19,11.11 19.39,11.11 19.39,11.85
  pour AGND/PWR (no thermals): 9.52,17.45 arc180 9.67,17.45 arc180
  pour AGND/PWR (no thermals): 12.32,17.45 arc180 12.47,17.45 arc180
  pour Bottom (no thermals): 12.32,17.45 arc180 12.47,17.45 arc180
  pour Bottom (no thermals): 11.98,14.29 arc180 12.13,14.29 arc180
  pour AGND/PWR (no thermals): 11.98,14.29 arc180 12.13,14.29 arc180
  pour AGND/PWR (no thermals): 9.12,14.65 arc180 9.27,14.65 arc180
  pour Bottom (no thermals): 9.12,14.65 arc180 9.27,14.65 arc180
  pour Top (no thermals): 12.36,13.05 arc180 12.61,13.05 arc180
  pour AGND/PWR (no thermals): 12.36,13.05 arc180 12.61,13.05 arc180
  pour AGND/PWR (no thermals): 8.69,17.91 arc180 8.89,17.91 arc180
  pour Top (no thermals): 13.81,13.98 arc180 14.01,13.98 arc180
  pour Route3 (no thermals): 13.81,13.98 arc180 14.01,13.98 arc180
  pour Top (no thermals): 15.62,14.1 arc180 15.87,14.1 arc180
  pour Route3 (no thermals): 15.62,14.1 arc180 15.87,14.1 arc180
  pour AGND/PWR (no thermals): 12.32,14.65 arc180 12.47,14.65 arc180
+3V3  (via drill 0.1, 0.1 layers 1-6, 0.1 layers 7-16, 0.2, 0.2 layers 1-6)
  Top 0.051: v16.17,15.61 16.05,15.54 R37.1 | R52.1 v17.76,5.82 | R44.1 v17.78,5.4 | v17.76,8.1 17.64,8.1 R33.1 | U10.3 8.48,0.74 8.82,1.08 9.19,1.08 9.32,0.96 9.64,0.96 10.04,1.35 10.8,1.35 R28.1
  Top 0.076: C40.1 11.12,13 v11.11,13 | v12.25,3.21 U9.25 | U6.C3 v10.21,5.97 | v7.25,13.71 7.25,13.94 7.61,14.3 7.9,14.3 7.86,14.26 R41.2 | C5.1 6.77,7.91 | U4.7 v7.14,7.28 v7.14,7.29 | C21.1 12.21,2.73 12.25,2.73 | U12.C3
  Top 0.15: v7.8,17.76 7.94,17.62 U11.C3 | U10.28 7.09,1.11 | U10.3 8.47,0.58
  Top 0.2: C40.1 11.12,12.57 U15.1 | U8.C3 13.74,15.52 v14.01,15.25 14.03,15.23 C27.1 C76.1 | C32.1 7.8,18.21 v7.8,17.76 | C31.1 6.96,1.11 U10.28 7.38,0.9 8.29,0.9 8.48,0.71 U10.3 | C35.1 6.33,1.55 C31.1 | U12.C3 6.19,1.55 C31.1 | R53.1 6.58,2.73 v6.58,2.63 | C5.1 6.99,7.67 6.99,7.41 U4.7 | 12.25,2.73 U9.25 | C21.1 12.11,2.61 C20.1
  Route2/PWR 0.2: v11.11,13 11.24,12.87 11.24,12.25 | 18.47,12.17 18.41,12.43 18.02,13.36 17.69,14.05 17.25,14.73 16.93,15.18 16.5,15.61 v16.17,15.61 | 18.47,12.17 | 18.47,12.17 18.74,11.05 | C31.1 6.58,1.61 v6.58,2.63
  Route3 0.3: v11.5,3.17 11.44,3.12 10.84,3.12 10.72,3 v9.33,3
  AGND/PWR 0.15: v16.17,15.61 15.71,15.39
  Bottom 0.076: 10.77,15.85 U14.F5 10.95,15.85 C60.1 10.97,15.85 | U14.D5 10.97,16.65 C61.1 10.99,16.63 10.99,16.65 | U14.E6 10.39,16.23 | U14.E4 11.19,16.28 | R56.1 v10.31,18.61 | R55.1 v9.33,18.59 | 10.43,16.46 10.07,16.46 R54.1 | U19.1 U19.4 | R51.2 v8.97,13.55
  Bottom 0.15: U14.E6 10.39,16.43 10.43,16.46 C58.1 | 10.61,16.65 U14.D5 | 10.81,16.65 10.99,16.65 | 11.19,16.28 11.19,16.45 | 11.19,16.08 U14.E4 | U14.F5 10.97,15.85 | 10.59,15.85 10.61,15.85 | 10.77,15.85 10.61,15.85 | 10.39,16.05 10.39,16.23 | 10.61,15.85 C59.1
  Bottom 0.2: U14.E4 C62.1 | C59.1 10.64,15.83 | C71.1 11.59,13.75 U19.4 11.49,13.38 v11.11,13 | U2.2 13.18,17.16 C3.1 v13.22,17.08 v13.21,17.07
  other vias: 11.19,16.25 10.39,16.25 10.79,16.65 10.79,15.85 13.29,13.85 5.84,1.9 10.95,5.44 6.52,1.55 10.95,3.71
  pour AGND/PWR (isolate 0.05, rank 3, no thermals): -0.51,12.55 -0.51,19.35 19.89,19.35 19.89,12.55
  pour Route2/PWR (isolate 0.02, rank 3): 20.99,2.45 5.89,2.45 5.89,3.63 6.99,3.63 6.99,8.45 10.89,12.35 20.99,12.35
  pour Bottom (no thermals): 11.12,16.25 arc180 11.27,16.25 arc180
  pour Bottom (no thermals): 11.12,16.25 arc180 11.27,16.25 arc180
  pour Bottom (no thermals): 11.12,16.25 arc180 11.27,16.25 arc180
  pour Bottom (no thermals): 10.32,16.25 arc180 10.47,16.25 arc180
  pour Bottom (no thermals): 10.32,16.25 arc180 10.47,16.25 arc180
  pour Bottom (no thermals): 10.72,16.65 arc180 10.87,16.65 arc180
  pour Bottom (no thermals): 10.72,16.65 arc180 10.87,16.65 arc180
  pour Bottom (no thermals): 10.72,15.85 arc180 10.87,15.85 arc180
  pour Bottom (no thermals): 10.72,15.85 arc180 10.87,15.85 arc180
  pour Bottom (no thermals): 10.72,15.85 arc180 10.87,15.85 arc180
  pour AGND/PWR (no thermals): 16.05,15.61 arc180 16.3,15.61 arc180
  pour Top (no thermals): 16.05,15.61 arc180 16.3,15.61 arc180
  pour Route2/PWR (no thermals): 16.05,15.61 arc180 16.3,15.61 arc180
  pour Bottom (no thermals): 10.24,18.61 arc180 10.39,18.61 arc180
  pour Bottom (no thermals): 9.26,18.59 arc180 9.41,18.59 arc180
  pour Top (no thermals): 13.94,15.25 arc180 14.09,15.25 arc180
  pour Top (no thermals): 13.94,15.25 arc180 14.09,15.25 arc180
  pour Top (no thermals): 10.99,13 arc180 11.24,13 arc180
  pour Route2/PWR (no thermals): 10.99,13 arc180 11.24,13 arc180
  pour Bottom (no thermals): 10.99,13 arc180 11.24,13 arc180
  pour Top (no thermals): 12.13,3.21 arc180 12.38,3.21 arc180
  pour Top (no thermals): 17.69,5.82 arc180 17.84,5.82 arc180
  pour Top (no thermals): 17.71,5.4 arc180 17.86,5.4 arc180
  pour Top (no thermals): 17.69,8.1 arc180 17.84,8.1 arc180
  pour Route2/PWR (no thermals): 6.51,2.63 arc180 6.66,2.63 arc180
  pour Top (no thermals): 6.51,2.63 arc180 6.66,2.63 arc180
  pour Top (no thermals): 7.73,17.76 arc180 7.88,17.76 arc180
  pour Top (no thermals): 7.73,17.76 arc180 7.88,17.76 arc180
  pour Bottom (no thermals): 13.14,17.07 arc180 13.29,17.07 arc180
  pour Top (no thermals): 7.18,13.71 arc180 7.33,13.71 arc180
  pour Top (no thermals): 5.77,1.9 arc180 5.92,1.9 arc180
  pour Top (no thermals): 7.07,7.29 arc180 7.22,7.29 arc180
  pour Top (no thermals): 10.13,5.97 arc180 10.28,5.97 arc180
  pour Bottom (no thermals): 8.9,13.55 arc180 9.05,13.55 arc180
  pour Top (no thermals): 6.4,1.55 arc180 6.65,1.55 arc180
  pour Route2/PWR (no thermals): 6.4,1.55 arc180 6.65,1.55 arc180
  pour Top (no thermals): 6.4,1.55 arc180 6.65,1.55 arc180
  pour Top (no thermals): 6.4,1.55 arc180 6.65,1.55 arc180
  pour Route3 (no thermals): 9.21,3 arc180 9.46,3 arc180
  pour Route3 (no thermals): 11.38,3.17 arc180 11.63,3.17 arc180
+3V3_AN  (via drill 0.1 layers 7-16)
  AGND/PWR 0.15: U7.N2 13.44,1.2 13.64,1.2 14.2,1.51 v14.22,1.53
  Bottom 0.076: U7.M15 U7.M16
  Bottom 0.15: 6.59,2.49 12.5,2.49 12.84,2.15 12.84,1.8 U7.N2 | v14.22,1.53 14.23,1.53 14.73,1.8 15.44,2.36 15.95,2.77 16.89,3.81 | 16.89,3.81 | 16.89,3.81 16.99,3.92 17.16,4.19 | J9.4 17.27,6.05 17.16,5.95 17.16,4.19 | 17.16,4.19 | 17.16,4.19
  Bottom 0.152: C30.2 5.08,3.2 5.47,2.81 6.27,2.81 6.59,2.49 U7.M15 U7.N15
  Bottom 0.2: U13.1 C38.1 | 3.2,5.2 3.29,5.1 3.4,5.1 3.61,4.9 3.61,4.76 | 3.76,4.61 4.12,4.25
  Bottom 0.3: C38.1 2.74,5.65 3.2,5.2 | C30.2 4.68,3.5 4.33,3.85 4.33,4.04 4.12,4.25 | 3.61,4.76 3.76,4.61
  other vias: 13.09,1.55
  pour AGND/PWR (no thermals): 14.14,1.53 arc180 14.29,1.53 arc180
  pour Bottom (no thermals): 14.14,1.53 arc180 14.29,1.53 arc180
  pour Bottom (no thermals): 13.02,1.55 arc180 13.17,1.55 arc180
  pour AGND/PWR (no thermals): 13.02,1.55 arc180 13.17,1.55 arc180
+15V0  (via drill 0.1, 0.1 layers 1-6, 0.2)
  Top 0.15: 5.29,12.21 4.89,11.81 2.15,11.81 v1.97,11.63
  Top 0.2: U16.1 5.29,12.21 | v1.97,11.63 1.72,11.63 R45.2
  Route2/PWR 0.1: v15.43,12.93 15.43,12.92 | 12.54,17.91 12.33,18.11 11.81,18.21 8.67,18.21 8.58,18.12 8.02,18.12
  Route2/PWR 0.15: v15.43,12.93 15.25,13.12 15.25,13.59 14.99,13.85 14.99,14.99 14.14,15.84 13.37,16.61 13.37,17.07 12.54,17.91
  Route2/PWR 0.2: 1.97,13.35 v1.97,11.63 | 7.11,14.53 6.91,14.34 2.95,14.34 1.97,13.35 | 8.02,18.12 7.66,18.12 7.11,17.57 7.11,14.53 | v1.23,13.37 1.25,13.35 1.97,13.35 | v7.46,14.55 7.13,14.55 7.11,14.53
  Bottom 0.076: v15.43,12.93 U5.12
  Bottom 0.2: C8.1 15.35,12.85 arc90 v15.43,12.93 | v1.23,13.37 1.32,13.46 2.26,13.46 2.75,12.97 C42.1 | C1.1 8.24,14.52 U1.3 v7.46,14.55
  pour Route2/PWR (no thermals): 1.9,11.63 arc180 2.05,11.63 arc180
  pour Top (no thermals): 1.9,11.63 arc180 2.05,11.63 arc180
  pour Top (no thermals): 1.9,11.63 arc180 2.05,11.63 arc180
  pour Route2/PWR (no thermals): 15.36,12.93 arc180 15.51,12.93 arc180
  pour Bottom (no thermals): 15.36,12.93 arc180 15.51,12.93 arc180
  pour Bottom (no thermals): 15.36,12.93 arc180 15.51,12.93 arc180
  pour Route2/PWR (no thermals): 15.36,12.93 arc180 15.51,12.93 arc180
  pour Route2/PWR (no thermals): 7.39,14.55 arc180 7.54,14.55 arc180
  pour Bottom (no thermals): 7.39,14.55 arc180 7.54,14.55 arc180
  pour Bottom (no thermals): 1.11,13.37 arc180 1.36,13.37 arc180
  pour Route2/PWR (no thermals): 1.11,13.37 arc180 1.36,13.37 arc180
-15V0  (via drill 0.2)
  Top 0.2: 3.72,15.2 C64.1 | 3.65,15.2 C64.1 | D9.A 3.93,16.85 3.49,16.53 3.2,16.24 C57.2 3.37,15.93 3.37,15.21 | C64.1 3.88,14.65 v3.87,14.64 | C64.1 3.88,15.21 3.37,15.21 | R50.1 3.15,15.21 3.37,15.21
  Route2/PWR 0.1: 12.9,18.04 12.47,18.23 12.36,18.27 11.79,18.38 8.52,18.38 | 7.49,18.38 7.39,18.38
  Route2/PWR 0.15: v15.41,14.55 15.41,15.03 14.57,15.87 14.57,16.43 13.69,17.32 13.55,17.32 13.04,17.82 12.9,18.04 | 8.52,18.38 7.49,18.38 7.42,18.38 7.39,18.35
  Route2/PWR 0.2: 7.39,18.35 6.86,17.82 3.87,14.83 v3.87,14.64
  Bottom 0.076: U5.1
  Bottom 0.1: 15.4,14.61 U5.1
  Bottom 0.15: U5.1 v15.41,14.55
  Bottom 0.2: C9.1 15.67,15.13 15.41,14.87 v15.41,14.55 | U1.PAD 5.85,14.52 U1.10 4.19,14.52 v3.87,14.64 3.99,14.64 C4.1
  pour Bottom (no thermals): 15.29,14.55 arc180 15.54,14.55 arc180
  pour Bottom (no thermals): 15.29,14.55 arc180 15.54,14.55 arc180
  pour Route2/PWR (no thermals): 15.29,14.55 arc180 15.54,14.55 arc180
  pour Bottom (no thermals): 3.75,14.64 arc180 4,14.64 arc180
  pour Top (no thermals): 3.75,14.64 arc180 4,14.64 arc180
  pour Route2/PWR (no thermals): 3.75,14.64 arc180 4,14.64 arc180
  pour Bottom (no thermals): 3.75,14.64 arc180 4,14.64 arc180
AGND  (via drill 0.1 layers 7-16)
  Bottom 0.127: 16.88,12.15 J8.M4 | J8.M1 16.88,8.95 | 2.3,8.95 J8.M2 | 12.93,2.75 12.87,2.69
  Bottom 0.15: 17.52,5.18 v17.52,5.12
  other vias: 3.59,2.57 10.14,1.17 2.65,3.39 3.62,3.72 1.8,6.96 1.13,6.51 2.15,6.47 0.82,7.3 1.55,9.43 1.61,10.11 0.48,11.06 2.39,10.89 2.57,9.97 1.41,10.95 2.29,11.43 2.09,4.55 18.12,8.35 18.49,7.92 18.39,6.88 16.17,10.87 1.33,8.15 1.83,9.09 2.93,10.63 5.63,1.25 11.85,0.69 11.09,1.17 12.44,0.8 3.59,10.05 3.99,11.05 4.39,10.01 4.79,11.05 5.19,10.05 5.59,11.05 5.99,10.05 6.39,11.05 7.18,11.05 7.99,11.05 8.79,11.05 10.39,11.05 9.59,11.05 11.19,11.05 11.99,11.05 12.79,11.05 13.59,11.05 14.39,11.05 15.19,11.05 6.79,10.05 7.59,10.05 8.39,10.05 9.19,10.05 9.99,10.05 10.78,10.04 12.39,10.05 13.19,10.05 13.99,10.05 14.79,10.05 15.59,10.05 12.73,1.07 17.27,9.23 17.09,9.91 16.17,8.19 18.27,11.71 0.71,7.96 2.11,5.7 1.65,12.19 3.13,7.47 2.24,9.34 6.66,6.31 6.65,5.55 6.66,4.4 6.67,3.32 7.66,3.06 8.82,3.05 9.77,3.61 8.53,3.74 10.67,6.36 9.71,6.19 17.35,10.78 4.99,1.6 13.29,2.27 13.59,1.55 11.59,10.05 1.54,5.36 2,4.27 3.94,3.84 2.37,5.15 17.12,6.42 12.12,3.89 12.21,5.92 10.81,5.17 11.87,2.92 8.31,5.09 8.08,5.99 15.95,5.71 15.94,7.24 14.58,2.9 15.78,2.95 16.58,3.85 16.92,7.42 13.1,1 6.29,2.3 2.93,11.43
  pour AGND/PWR (isolate 0.1, rank 3): -0.51,12.35 19.89,12.35 19.89,-0.05 -0.51,-0.05
  pour Bottom (isolate 0.05, rank 3, no thermals): -1.81,12.35 19.79,12.35 19.79,-0.55 -1.81,-0.55
  pour Bottom (no thermals): 17.45,5.12 arc180 17.6,5.12 arc180
AUXIN1
  Bottom 0.051: U7.N3 12.59,1.45 12.69,1.35 13.21,1.35 13.34,1.48 13.34,1.66 13.46,1.78 13.99,1.78 14.9,2.69 15.35,3.14 15.35,3.15 15.35,3.73 16.18,4.56 TP5.TP 16.69,4.82 16.69,6.15 16.69,6.7 17.24,7.25 J9.1
AUXIN2
  Bottom 0.051: U7.N4 12.12,1.53 12.26,1.53 12.54,1.25 13.57,1.25 13.73,1.34 | 13.82,1.42 13.75,1.35 13.73,1.34 | 13.73,1.34 13.82,1.42 | J9.2 17.14,6.85 16.87,6.58 16.87,4.39 16.02,3.54 TP6.TP 15.95,3.39 15.14,2.58 13.82,1.42
AUXIN3  (via drill 0.1)
  Route2/PWR 0.076: v12.23,1.21 12.17,1.21 11.37,0.41 11.07,0.36 10.07,0.36 8.47,0.31 7.76,0.42 6.45,0.79 5.8,1.02 5.27,1.31 4.43,1.77 3.2,2.74 2.74,3.25 2.64,3.37 v2.64,3.78
  Bottom 0.076: 11.6,1.53 U7.N5 11.93,1.21 v12.23,1.21 | 2.99,3.98 SJ1.COM 2.99,4.13 v2.64,3.78
  pour Route2/PWR (no thermals): 12.16,1.21 arc180 12.31,1.21 arc180
  pour Bottom (no thermals): 12.16,1.21 arc180 12.31,1.21 arc180
  pour Route2/PWR (no thermals): 2.56,3.78 arc180 2.72,3.78 arc180
  pour Bottom (no thermals): 2.56,3.78 arc180 2.72,3.78 arc180
CONF_DONE  (via drill 0.1)
  Top 0.076: v10.73,18.58 11.26,18.58 U14.A2
  Bottom 0.076: R56.2 11.01,18.53 10.98,18.56 v10.73,18.58
  pour Bottom (no thermals): 10.66,18.58 arc180 10.81,18.58 arc180
  pour Top (no thermals): 10.66,18.58 arc180 10.81,18.58 arc180
CONFIG_SEL  (via drill 0.1)
  Top 0.051: U14.C6 10.59,17.25 10.59,18.05 10.46,18.18 10.23,18.18 9.38,18.18 9.25,18.18 8.87,18.56 v8.87,18.6
  Bottom 0.076: R57.1 v8.87,18.6
  pour Bottom (no thermals): 8.8,18.6 arc180 8.95,18.6 arc180
  pour Top (no thermals): 8.8,18.6 arc180 8.95,18.6 arc180
DAC_CS  (via drill 0.1, 0.1 layers 1-6)
  Route3 0.076: U14.A5 11.23,18.29 12.73,18.29 13.45,17.57 13.45,17.46 13.91,17 14.69,17 v15.47,16.22
  Bottom 0.076: U2.5 15.61,16.09 v15.47,16.22
  other vias: 10.79,17.85
  pour Bottom (no thermals): 15.4,16.22 arc180 15.55,16.22 arc180
  pour Route3 (no thermals): 15.4,16.22 arc180 15.55,16.22 arc180
  pour Route3 (no thermals): 10.72,17.85 arc180 10.87,17.85 arc180
DAC_MOSI  (via drill 0.1, 0.1 layers 1-6)
  Route3 0.076: U14.A4 11.43,18.09 12.57,18.09 13.91,16.75 14.43,16.75 v15.22,15.96
  Bottom 0.076: v15.22,15.96 15.22,15.83 U2.6
  other vias: 11.19,17.85
  pour Route3 (no thermals): 11.12,17.85 arc180 11.27,17.85 arc180
  pour Bottom (no thermals): 15.14,15.96 arc180 15.29,15.96 arc180
  pour Route3 (no thermals): 15.14,15.96 arc180 15.29,15.96 arc180
DAC_SCLK/TDI  (via drill 0.1, 0.1 layers 1-6)
  Top 0.051: TP12.TP 11.87,13.81 12.34,13.81 12.83,14.31 12.83,15.99 12.57,16.25 U14.E1
  Route2/PWR 0.076: v12.88,16.29 12.84,16.25 U14.E1
  Bottom 0.076: v12.88,16.29 12.88,17.14 12.88,17.54 13.29,17.95 13.61,17.95 14.01,17.75 U2.4
  other vias: 12.39,16.25
  pour Route2/PWR (no thermals): 12.32,16.25 arc180 12.47,16.25 arc180
  pour Top (no thermals): 12.32,16.25 arc180 12.47,16.25 arc180
  pour Bottom (no thermals): 12.81,16.29 arc180 12.96,16.29 arc180
  pour Route2/PWR (no thermals): 12.81,16.29 arc180 12.96,16.29 arc180
DATA1  (via drill 0.1 layers 1-6)
  Route2/PWR 0.076: U14.C7 9.79,16.85 9.79,16.55 9.69,16.45 9.04,16.45 8.76,16.18 8.76,13.88 8.02,13.13 4.7,13.13 4.16,12.59 4.16,11.39 2.61,9.84 2.61,8.38 6.23,4.75 8.14,4.75 9.24,5.85 U6.C1
  other vias: 9.24,6 9.99,17.05
  pour Route2/PWR (no thermals): 9.17,6 arc180 9.32,6 arc180
  pour Route2/PWR (no thermals): 9.92,17.05 arc180 10.07,17.05 arc180
DATA2
  Top 0.051: U14.C3 11.79,17.25 12.45,17.25 12.46,17.24 12.47,17.24 12.64,17.08 12.86,17.08 13.18,16.75 13.74,16.75 U8.C1
DATA3
  Top 0.051: U14.A7 9.79,18.05 8.99,18.05 8.79,17.85 8.79,17.46 U11.C1
DATA4  (via drill 0.1 layers 1-6)
  Top 0.076: U12.C1 4.86,1.87 4.85,1.98 U12.C1
  Route3 0.076: U14.B6 9.51,18.34 7.4,18.34 6.82,17.76 5.96,17.76 5.72,17.76 3.76,15.8 3.51,15.8 2.36,14.65 2.36,14.22 1.85,13.72 1.85,12.87 1.27,12.28 1.27,10.56 1.42,10.4 1.42,8.82 1.27,8.66 1.27,7.31 | U12.C1 4.84,2.56 2.42,4.98 2.42,5.39 1.27,6.54 1.27,7.31 | 1.27,7.31
  other vias: 4.84,1.9 10.39,17.45
  pour Top (no thermals): 4.77,1.9 arc180 4.92,1.9 arc180
  pour Top (no thermals): 4.77,1.9 arc180 4.92,1.9 arc180
  pour Route3 (no thermals): 4.77,1.9 arc180 4.92,1.9 arc180
  pour Route3 (no thermals): 10.32,17.45 arc180 10.47,17.45 arc180
DIN0  (via drill 0.1 layers 1-6)
  Route3 0.076: U14.J6 10.39,14.4 10.59,14.2 10.59,13.85 10.27,13.54 10.27,13.12 9.44,12.28 7.62,12.28 6.04,10.7 6.04,10.2 5.79,9.95 5.79,8.3 6.17,7.93 6.17,7.34 6.66,6.85 8.68,6.85 8.74,6.91 10.93,6.91 11.14,6.7 11.29,6.7 U9.19
  other vias: 11.6,6.39 10.39,14.65
  pour Route3 (no thermals): 11.53,6.39 arc180 11.68,6.39 arc180
  pour Route3 (no thermals): 10.32,14.65 arc180 10.47,14.65 arc180
DIN1  (via drill 0.1 layers 1-6)
  Top 0.051: U14.G6 10.19,15.25 10.19,14.3 v10.39,14.1
  Route3 0.076: U9.20 11.08,6.41 10.75,6.41 10.47,6.7 8.89,6.7 8.85,6.66 8.82,6.66 6.56,6.66 5.94,7.28 5.94,7.85 5.59,8.2 5.59,10.15 5.79,10.35 5.79,10.85 7.42,12.48 9.34,12.48 10.08,13.22 10.08,13.59 10.39,13.9 v10.39,14.1
  other vias: 11.6,5.89
  pour Route3 (no thermals): 11.53,5.89 arc180 11.68,5.89 arc180
  pour Top (no thermals): 10.32,14.1 arc180 10.47,14.1 arc180
  pour Route3 (no thermals): 10.32,14.1 arc180 10.47,14.1 arc180
DIN2  (via drill 0.1 layers 1-6)
  Route3 0.076: U14.H7 10.19,14.85 10.19,14.15 9.92,13.88 9.92,13.33 9.24,12.65 8.75,12.65 8.69,12.71 7.25,12.71 6.1,11.56 5.65,11.56 5.54,11.45 5.54,10.4 5.34,10.2 5.34,8.15 5.73,7.77 5.73,7.2 6.43,6.49 9.19,6.49 9.47,6.21 9.47,5.91 9.73,5.65 11.34,5.65 U9.21
  other vias: 11.6,5.39 9.99,15.05
  pour Route3 (no thermals): 11.53,5.39 arc180 11.68,5.39 arc180
  pour Route3 (no thermals): 9.92,15.05 arc180 10.07,15.05 arc180
DIN3  (via drill 0.1 layers 1-6)
  Route3 0.076: U14.J7 9.99,14.25 8.69,12.95 7.19,12.95 6.06,11.82 5.56,11.82 5.24,11.5 5.24,10.4 5.09,10.25 5.09,8.1 5.49,7.7 5.49,7.15 6.36,6.28 8.49,6.28 9.38,5.4 10.28,5.4 10.6,5.08 11.41,5.08 U9.22
  other vias: 9.99,14.65 11.6,4.89
  pour Route3 (no thermals): 9.92,14.65 arc180 10.07,14.65 arc180
  pour Route3 (no thermals): 11.53,4.89 arc180 11.68,4.89 arc180
DIN4  (via drill 0.1 layers 1-6)
  Route3 0.076: U14.G8 9.4,15.26 8,15.26 7.84,15.42 6.37,15.42 5,14.05 5,13.55 3.99,12.54 3.99,11.25 3.79,11.05 3.79,7.53 6.13,5.19 6.67,4.65 11.34,4.65 U9.23
  other vias: 11.6,4.39 9.59,15.45
  pour Route3 (no thermals): 11.53,4.39 arc180 11.68,4.39 arc180
  pour Route3 (no thermals): 9.52,15.45 arc180 9.67,15.45 arc180
DIN5  (via drill 0.1 layers 1-6)
  Route3 0.076: U14.G9 8.76,15.45 8.16,16.05 6.54,16.05 3.79,13.31 3.79,11.48 3.49,11.17 3.49,7.42 6.51,4.4 8.44,4.4 8.94,3.9 11.59,3.9 U9.24
  other vias: 11.6,3.89 9.19,15.45
  pour Route3 (no thermals): 11.53,3.89 arc180 11.68,3.89 arc180
  pour Route3 (no thermals): 9.12,15.45 arc180 9.27,15.45 arc180
DIN6  (via drill 0.1 layers 1-6)
  Top 0.076: U14.F7
  Route3 0.076: U14.F7 9.8,15.66 8.88,15.66 8.26,16.28 6.38,16.28 3.55,13.46 3.55,12.24 3.23,11.92 3.23,6.75 5.09,4.9 5.09,4.48 5.52,4.05 6.29,4.05 6.48,3.86 7.97,3.86 8.38,3.45 12.54,3.45 U9.26
  other vias: 9.99,15.85 12.75,3.24
  pour Top (no thermals): 9.92,15.85 arc180 10.07,15.85 arc180
  pour Route3 (no thermals): 9.92,15.85 arc180 10.07,15.85 arc180
  pour Route3 (no thermals): 12.68,3.24 arc180 12.83,3.24 arc180
DIN7  (via drill 0.1 layers 1-6)
  Route3 0.076: U9.27 12.95,2.94 12.58,2.94 12.25,2.61 7.69,2.61 7.44,2.86 6.33,2.86 2.6,6.59 2.6,7.22 2.95,7.56 2.95,7.74 2.67,8.02 2.67,12.18 2.93,12.44 2.93,13.27 6.16,16.5 8.34,16.5 8.79,16.05 9.79,16.05 U14.E7
  other vias: 13.25,3.24 9.99,16.25
  pour Route3 (no thermals): 13.18,3.24 arc180 13.33,3.24 arc180
  pour Route3 (no thermals): 9.92,16.25 arc180 10.07,16.25 arc180
DIN8  (via drill 0.1 layers 1-6)
  Top 0.076: U9.29 14.25,3.44 v14.1,3.44
  Route3 0.076: U14.E8 9.39,16.45 8.77,16.45 8.34,16.88 7.39,16.88 7.33,16.94 6.18,16.94 4.34,15.1 3.8,15.1 2.95,14.25 2.95,13.83 2.7,13.58 2.7,12.57 2.26,12.13 2.26,8.69 2.08,8.5 2.08,7.46 2.34,7.2 2.34,6.3 6.25,2.38 7.24,2.38 7.24,2.39 13.05,2.39 v14.1,3.44
  other vias: 9.59,16.25
  pour Top (no thermals): 14.03,3.44 arc180 14.18,3.44 arc180
  pour Route3 (no thermals): 14.03,3.44 arc180 14.18,3.44 arc180
  pour Route3 (no thermals): 9.52,16.25 arc180 9.67,16.25 arc180
DIN9  (via drill 0.1 layers 1-6)
  Route3 0.076: U14.C8 8.82,17.05 8.54,17.33 5.95,17.33 3.97,15.34 3.63,15.34 2.77,14.48 2.77,14.08 2.32,13.63 2.32,12.53 1.73,11.94 1.73,11.45 1.99,11.19 1.99,8.9 1.87,8.78 1.87,6.48 6.13,2.21 13.55,2.21 14.58,3.24 U9.30
  other vias: 14.75,3.24 9.59,17.05
  pour Route3 (no thermals): 14.68,3.24 arc180 14.83,3.24 arc180
  pour Route3 (no thermals): 9.52,17.05 arc180 9.67,17.05 arc180
DIN10  (via drill 0.1 layers 1-6)
  Top 0.076: U9.31 v15.25,3.54
  Route3 0.076: U14.C5 10.99,16.85 10.99,14.33 11.62,13.7 11.62,12.93 12.84,11.7 13.39,11.7 16.14,8.95 16.14,6.41 15.74,6 15.74,4.6 15.25,4.11 v15.25,3.54
  other vias: 10.79,17.05
  pour Route3 (no thermals): 15.18,3.54 arc180 15.33,3.54 arc180
  pour Top (no thermals): 15.18,3.54 arc180 15.33,3.54 arc180
  pour Route3 (no thermals): 10.72,17.05 arc180 10.87,17.05 arc180
DIN11  (via drill 0.1 layers 1-6)
  Top 0.076: 15.75,3.3 U9.32 15.75,3.6 v15.56,3.79
  Route3 0.076: v15.56,3.79 15.56,4.11 15.91,4.45 15.91,5.6 16.34,6.04 16.34,9.1 12.89,12.55 12.49,12.55 11.87,13.18 11.87,13.78 11.39,14.25 11.39,15.55 11.5,15.66 11.67,15.66 11.78,15.77 11.78,16.46 U14.C4
  other vias: 11.19,17.05
  pour Route3 (no thermals): 15.48,3.79 arc180 15.63,3.79 arc180
  pour Top (no thermals): 15.48,3.79 arc180 15.63,3.79 arc180
  pour Route3 (no thermals): 11.12,17.05 arc180 11.27,17.05 arc180
E0
  Bottom 0.051: J8.2 15.99,8.55 15.69,8.25 15.69,5.38 13.62,3.3 13.34,3.3 U7.K2
E1
  Bottom 0.051: U7.J1 15.57,5.53 15.57,8.33 15.79,8.55 15.79,11.35 15.99,11.55 J8.69
E2
  Bottom 0.051: J8.3 15.59,8.55 15.44,8.4 15.44,5.63 13.62,3.8 13.34,3.8 U7.J2
E3
  Bottom 0.051: U7.H1 15.32,5.78 15.32,8.48 15.39,8.55 15.39,11.35 15.59,11.55 J8.68
E4
  Bottom 0.051: J8.4 15.19,5.88 13.62,4.3 13.34,4.3 U7.H2
E5
  Bottom 0.051: U7.G1 15.07,6.03 15.07,8.38 14.99,8.45 14.99,11.35 15.19,11.55 J8.67
E6
  Bottom 0.051: J8.5 14.79,8.45 14.94,8.3 14.94,6.13 13.62,4.8 13.34,4.8 U7.G2
E7
  Bottom 0.051: U7.F1 14.82,6.28 14.82,8.23 14.59,8.45 14.59,11.35 14.79,11.55 J8.66
E8
  Bottom 0.051: J8.6 14.39,8.45 14.69,8.15 14.69,6.38 13.62,5.3 13.34,5.3 U7.F2
E9
  Bottom 0.051: U7.E1 14.57,6.53 14.57,8.08 14.19,8.45 14.19,11.35 14.39,11.55 J8.65
E10
  Bottom 0.051: J8.7 13.99,8.45 14.44,8 14.44,6.63 13.62,5.8 13.34,5.8 U7.E2
E11
  Bottom 0.051: U7.D1 14.32,6.78 14.32,7.93 13.79,8.45 13.79,11.35 13.99,11.55 J8.64
E12
  Bottom 0.051: J8.8 13.59,8.45 14.19,7.85 14.19,6.88 13.62,6.3 13.34,6.3 U7.D2
E13
  Bottom 0.051: U7.C1 14.07,7.03 14.07,7.78 13.39,8.45 13.39,11.35 13.59,11.55 J8.63
E14
  Bottom 0.051: J8.9 13.19,8.45 13.94,7.7 13.94,7.15 13.59,6.8 13.34,6.8 U7.C2
E15
  Bottom 0.051: U7.B1 13.82,7.28 13.82,7.6 12.99,8.43 12.99,11.35 13.19,11.55 J8.62
E16
  Bottom 0.051: U7.A1 12.79,8.35 J8.10
E17